# EAGLE board Logic Engine v0.2 (EAGLE 6.5.0)

Size 60.96 x 35.56 mm. Coordinates in mm from the lower left corner, seen from the top.
Outline: 0,35.56 0,1.91 arc90 1.91,0 59.05,0 arc90 60.96,1.91 60.96,35.56 0,35.56
Copper layers (1*16): Top 0.0356mm / dielectric 1.5011mm / Bottom 0.0356mm
Design rules "LaenPCBOrder *": minimum track width 8mil, minimum drill 13mil, track to track 6mil, track to pad 6mil, pad to pad 6mil, via to via 12mil, smd to smd 6mil, copper to edge 15mil, drill to drill 6mil, minimum pad ring 7mil, minimum via ring 7mil, stop-mask expansion 4mil, vias tented up to drill 14mil, thermal gap 10mil
Net classes: 1 supply: width 0.508 mm, drill 0.152 mm, clearance 0.203 mm
Holes 3.2 mm at 58.42,4.76 2.46,4.76

## Footprints (pad centres in the part's own frame; a part is rotated, then mirrored left to right if it is on the bottom)
3364 = smd 1.3 x 1.5: 1 -1.45,-1.8; 3 1.45,-1.8 | smd 2.4 x 1.1: 2 0,2
C0805K = smd 1.1 x 1.4: 1 -1,0; 2 1,0
EIA3216 = smd 1.4 x 1.6: A 1.4,0; C -1.4,0
C1206 = smd 1.6 x 1.8: 1 -1.4,0; 2 1.4,0
CASE_B = smd 2.2 x 1.4: + 1.6,0; - -1.6,0
CHIPLED_1206 = smd 1.5 x 1.5: A 0,-1.75; C 0,1.75
SMA-DIODE = smd 1.27 x 1.47: A -2.15,0; C 2.15,0
1X2-3.5MM = drill 1 pad 2.184: 1 1.8,0; 2 -1.7,0
1812 = smd 2.286 x 2.794: 1 -2.046,0; 2 2.046,0
FIDUCIAL-1X2.5 = smd 1 x 1: 1 0,0
1X06-CLEAN = drill 1.016 octagon: 1 -6.35,0; 2 -3.81,0; 3 -1.27,0; 4 1.27,0; 5 3.81,0; 6 6.35,0
1X04-CB = drill 1.016 pad 1.676 octagon: 1 -3.81,0; 2 -1.27,0; 3 1.27,0; 4 3.81,0
TQFP32-08 = smd 1.27 x 0.559: 1 -4.293,2.8; 2 -4.293,2; 3 -4.293,1.2; 4 -4.293,0.4; 5 -4.293,-0.4; 6 -4.293,-1.2; 7 -4.293,-2; 8 -4.293,-2.8; 17 4.293,-2.8; 18 4.293,-2; 19 4.293,-1.2; 20 4.293,-0.4; 21 4.293,0.4; 22 4.293,1.2; 23 4.293,2; 24 4.293,2.8 | smd 0.559 x 1.27: 9 -2.8,-4.293; 10 -2,-4.293; 11 -1.2,-4.293; 12 -0.4,-4.293; 13 0.4,-4.293; 14 1.2,-4.293; 15 2,-4.293; 16 2.8,-4.293; 25 2.8,4.293; 26 2,4.293; 27 1.2,4.293; 28 0.4,4.293; 29 -0.4,4.293; 30 -1.2,4.293; 31 -2,4.293; 32 -2.8,4.293
AVRISP = drill 0.9 pad 1.626: 1 -1.27,2.54; 2 1.27,2.54; 3 -1.27,0; 4 1.27,0; 5 -1.27,-2.54; 6 1.27,-2.54
SRN8040 = smd 2.2 x 8: P$1 1.125,4; P$2 6.875,4
MDF7_1X03 = drill 0.95 long: 1 -2.54,0; 2 0,0; 3 2.54,0 | hole 1.2: 0,3; 2.54,3; -2.54,3
1X03 = drill 1.016 long: 1 -2.54,0; 2 0,0; 3 2.54,0
0603-RES = smd 1.1 x 1: 1 -0.85,0; 2 0.85,0
TPS6213X = smd 1.45 x 0.55: 1 -3.2,1.5; 2 -3.2,0.5; 3 -3.2,-0.5; 4 -3.2,-1.5; 9 3.2,-1.5; 10 3.2,-0.5; 11 3.2,0.5; 12 3.2,1.5 | smd 0.55 x 1.45: 5 -1.5,-3.2; 6 -0.5,-3.2; 7 0.5,-3.2; 8 1.5,-3.2; 13 1.5,3.2; 14 0.5,3.2; 15 -0.5,3.2; 16 -1.5,3.2 | smd 3.2 x 3.2: 17-THERMALPAD 0,0
TACTILE_SWITCH_SMD = smd 1.524 x 0.762: 1 -2.54,1.905; 2 2.54,1.905; 3 -2.54,-1.905; 4 2.54,-1.905
R0805 = smd 1.1 x 1.4: 1 -1,0; 2 1,0
EDG-04 = drill 0.813 long: 1 -3.81,-3.81; 2 -1.27,-3.81; 3 1.27,-3.81; 4 3.81,-3.81; 5 3.81,3.81; 6 1.27,3.81; 7 -1.27,3.81; 8 -3.81,3.81
1X05 = drill 1.016 pad 1.88: 1 0,0; 2 2.54,0; 3 5.08,0; 4 7.62,0; 5 10.16,0
SOT23-5 = smd 0.55 x 1.2: 1 -0.95,-1.3; 2 0,-1.3; 3 0.95,-1.3; 4 0.95,1.3; 5 -0.95,1.3
SO016 = smd 0.6 x 1.2: 1 -4.445,-2.8; 2 -3.175,-2.8; 3 -1.905,-2.8; 4 -0.635,-2.8; 5 0.635,-2.8; 6 1.905,-2.8; 7 3.175,-2.8; 8 4.445,-2.8; 9 4.445,2.8; 10 3.175,2.8; 11 1.905,2.8; 12 0.635,2.8; 13 -0.635,2.8; 14 -1.905,2.8; 15 -3.175,2.8; 16 -4.445,2.8
MICROSD_SMALL = smd 0.6 x 1.25: 1 3.85,-0.05; 2 2.75,-0.05; 3 1.65,-0.05; 4 0.55,-0.05; 5 -0.55,-0.05; 6 -1.65,-0.05; 7 -2.75,-0.05; 8 -3.85,-0.05 | smd 0.95 x 0.85: CD1 4.775,-5.275 | smd 1 x 0.6: CD2 5.7,-4.3 | smd 1.2 x 3.8: MT1 -5,-3.8 | smd 1.45 x 1.4: MT2 5.475,-3.05
RESONATOR-SMD = smd 0.7 x 1.7: 1 -1.2,0; 2 0,0; 3 1.2,0

## Placement (x,y rotation side)
BRIGHT  [3364]  44.37,8.73 270 top
C1  0.1uF  [C0805K]  40.77,28.06 0 top
C2  0.1uF  [C0805K]  51.12,19.68 90 top
C3  0.1uF  [C0805K]  33.18,32.54 270 top
C4  10uF  [EIA3216]  49.21,11.43 90 top
CIN  10uF  [C1206]  14.61,23.5 180 top
CINX  100nF  [C0805K]  15.24,21.27 180 top
COLOR  [3364]  44.37,3.65 270 top
COUT  22uF  [CASE_B]  13.02,27.3 0 top
CSS  3.3nF  [C0805K]  15.24,19.05 180 top
D1  [CHIPLED_1206]  21.35,19.6 270 top
D2  Green  [CHIPLED_1206]  28.57,22.96 270 top
D3  BA340LA  [SMA-DIODE]  20.85,25.5 180 top
DELAY  [3364]  12.62,3.02 270 top
EXT.PWR  1X2-3.5MM  [1X2-3.5MM]  20.8,30.8 180 top
F1  [1812]  5.24,27.94 180 top
FADE  [3364]  19.61,3.02 270 top
FID1  FIDUCIAL1X2.5  [FIDUCIAL-1X2.5]  1.91,33.66 0 top
FID2  FIDUCIAL1X2.5  [FIDUCIAL-1X2.5]  1.91,8.26 0 top
FID3  FIDUCIAL1X2.5  [FIDUCIAL-1X2.5]  59.05,33.66 0 top
FTDI  [1X06-CLEAN]  43.78,34.13 180 top
I2C  [1X04-CB]  27.1,29.56 90 top
I2C1  [1X04-CB]  29.76,29.56 90 top
IC1  MEGA328P  [TQFP32-08]  39.22,21.66 270 top
ICSP  AVRISP-6  [AVRISP]  28.89,16.99 270 top
INDUCTOR  SRN8040-2R2Y  [SRN8040]  13.97,15.24 180 top
OUT1  [MDF7_1X03]  4.37,21.03 90 top
OUT2  [MDF7_1X03]  51.99,5.56 180 top
PWR_SEL1  [1X03]  10.79,32.54 180 top
R1  1K  [0603-RES]  20.95,21.59 0 top
R2  1K  [0603-RES]  27.62,20.95 180 top
R3  10K  [0603-RES]  52.7,12.06 90 top
R4  10K  [0603-RES]  38.73,2.22 270 top
R5  10K  [0603-RES]  36.2,2.22 270 top
R6  10K  [0603-RES]  33.66,2.22 270 top
R7  10K  [0603-RES]  31.11,2.22 270 top
REG  TPS62133  [TPS6213X]  20,12.22 45 top
RESET  [TACTILE_SWITCH_SMD]  57.15,12.7 0 top
RPG  100k  [R0805]  10,19.05 180 top
SW1  [EDG-04]  34.92,9.21 180 top
TEECES  [1X05]  27.03,12.47 270 top
U1  V_REG_LDOSMD  [SOT23-5]  49.85,15.88 90 top
U2  HEX_CONVERTER  [SO016]  48.58,29.21 0 top
U$1  MICROSD  [MICROSD_SMALL]  54.61,21.59 90 top
Y1  16MHz  [RESONATOR-SMD]  36.28,28.06 180 top

## Library data of the parts
BRIGHT COLOR DELAY FADE OUT1 OUT2 U$1 = rseries
C1-C3 CIN CINX CSS EXT.PWR F1 ICSP RPG = adafruit
C4 = SparkFun-Capacitors; PROD_ID: CAP-00811
COUT = dp_devices
D1 D2 = minimidi
D3 = SparkFun-DiscreteSemi; PROD_ID: DIO-09886
FID1-FID3 = SparkFun-Aesthetics
FTDI I2C I2C1 = carduino
IC1 = avr-7
INDUCTOR REG = joymonkey
PWR_SEL1 = pinhead
R1-R7 = SparkFun-Resistors
RESET = SparkFun-Electromechanical
SW1 = special
TEECES = SparkFun-Connectors
U1 = SparkFun-PowerIC
U2 = SparkFun-DigitalIC
Y1 = SparkFun-FreqCtrl; PROD_ID: XTAL-08900

## Nets
+5V [supply]: BRIGHT.3 C1.1 C2.1 COLOR.3 DELAY.3 F1.1 FADE.3 I2C1.4 I2C.4 IC1.4 IC1.6 IC1.18 ICSP.2 OUT1.2 OUT2.2 R1.1 R3.1 TEECES.2 U1.1 U1.3 U$1.4
ANALOG0: DELAY.2 IC1.23
ANALOG1: FADE.2 IC1.24
ANALOG2: BRIGHT.2 IC1.25
ANALOG3: COLOR.2 IC1.26
ANALOG4: I2C1.1 I2C.1 IC1.27
ANALOG5: I2C1.2 I2C.2 IC1.28
AREF: IC1.20
DIGITAL2: IC1.32 SW1.1
DIGITAL3: IC1.1 SW1.2
DIGITAL4: IC1.2 SW1.3
DIGITAL5: IC1.9 SW1.4
DIGITAL6: IC1.10 OUT1.1 OUT2.1
DIGITAL7: IC1.11 TEECES.5
DIGITAL8: IC1.12 TEECES.3
DIGITAL9: IC1.13 TEECES.4
DIGITAL10: IC1.14 U2.3
GND [supply]: BRIGHT.1 C1.2 C2.2 C4.C CIN.2 CINX.2 COLOR.1 COUT.- CSS.2 D1.C D2.C DELAY.1 EXT.PWR.1 FADE.1 FTDI.1 FTDI.2 I2C1.3 I2C.3 IC1.3 IC1.5 IC1.21 ICSP.6 OUT1.3 OUT2.3 R4.2 R5.2 R6.2 R7.2 REG.5 REG.6 REG.8 REG.15 REG.16 REG.17-THERMALPAD RESET.3 TEECES.1 U1.2 U2.8 U$1.6 U$1.MT1 U$1.MT2 Y1.2
MISO: IC1.16 ICSP.1 U$1.7
MOSI: IC1.15 ICSP.4 U2.5
N$1: IC1.7 Y1.1
N$2: IC1.8 Y1.3
N$3: INDUCTOR.P$1 REG.1
N$4: D2.A R2.2
N$5 [supply]: D1.A R1.2
N$6 [supply]: CIN.1 CINX.1 D3.C REG.10 REG.11 REG.12 REG.13
N$7: CSS.1 REG.9
N$8: REG.4 RPG.2
N$9 [supply]: COUT.+ INDUCTOR.P$2 PWR_SEL1.1 REG.7 REG.14 RPG.1
N$10: F1.2 PWR_SEL1.2
N$11: D3.A EXT.PWR.2
N$12: R4.1 SW1.8
N$13: R5.1 SW1.7
N$14: R6.1 SW1.6
N$15: R7.1 SW1.5
N$16: U2.4 U$1.3
N$17: U2.6 U$1.5
N$18: U2.2 U$1.2
N$19 [supply]: C4.A U1.5 U2.1
RST: C3.2 IC1.29 ICSP.5 R3.2 RESET.1
RTS#: C3.1 FTDI.6
RXD: FTDI.4 IC1.30
SCK: IC1.17 ICSP.3 R2.1 U2.7
TXD: FTDI.5 IC1.31
USB_5V [supply]: FTDI.3 PWR_SEL1.3

## Tracks (layer width: path | path; a pad name or v marks a point on that pad's centre or on a via)
+5V  (20 unrouted)
ANALOG0  (1 unrouted)
ANALOG1  (1 unrouted)
ANALOG2  (1 unrouted)
ANALOG3  (1 unrouted)
ANALOG4  (2 unrouted)
ANALOG5  (2 unrouted)
DIGITAL2  (1 unrouted)
DIGITAL3  (1 unrouted)
DIGITAL4  (1 unrouted)
DIGITAL5  (1 unrouted)
DIGITAL6  (2 unrouted)
DIGITAL7  (1 unrouted)
DIGITAL8  (1 unrouted)
DIGITAL9  (1 unrouted)
DIGITAL10  (1 unrouted)
GND  (41 unrouted)
MISO  (2 unrouted)
MOSI  (2 unrouted)
N$1  (1 unrouted)
N$2  (1 unrouted)
N$3  (1 unrouted)
N$4  (1 unrouted)
N$5  (1 unrouted)
N$6  (6 unrouted)
N$7  (1 unrouted)
N$8  (1 unrouted)
N$9  (5 unrouted)
N$10  (1 unrouted)
N$11  (1 unrouted)
N$12  (1 unrouted)
N$13  (1 unrouted)
N$14  (1 unrouted)
N$15  (1 unrouted)
N$16  (1 unrouted)
N$17  (1 unrouted)
N$18  (1 unrouted)
N$19  (2 unrouted)
RST  (4 unrouted)
RTS#  (1 unrouted)
RXD  (1 unrouted)
SCK  (3 unrouted)
TXD  (1 unrouted)
USB_5V  (1 unrouted)

## Text on the board
tPlace: RSERIES | POWER SELECT | GND | 7-17V | usb | GRN | tx | rx | +5 | - | BLK | ext | ext | POWER | G | +5V | 2013-09-10 | D8 | D9 | D10
_tsilk: + | G | C | D